# Altium PCB Main.PcbDoc
Units mm, origin at the board's own origin, x right, y up, seen from the top; angles counter-clockwise.
Board outline 95 x 57 mm, 2 copper layers (Top Layer, Bottom Layer), stack 1.671 mm thick; 77 components, 83 nets, 337 pads, 204 vias.
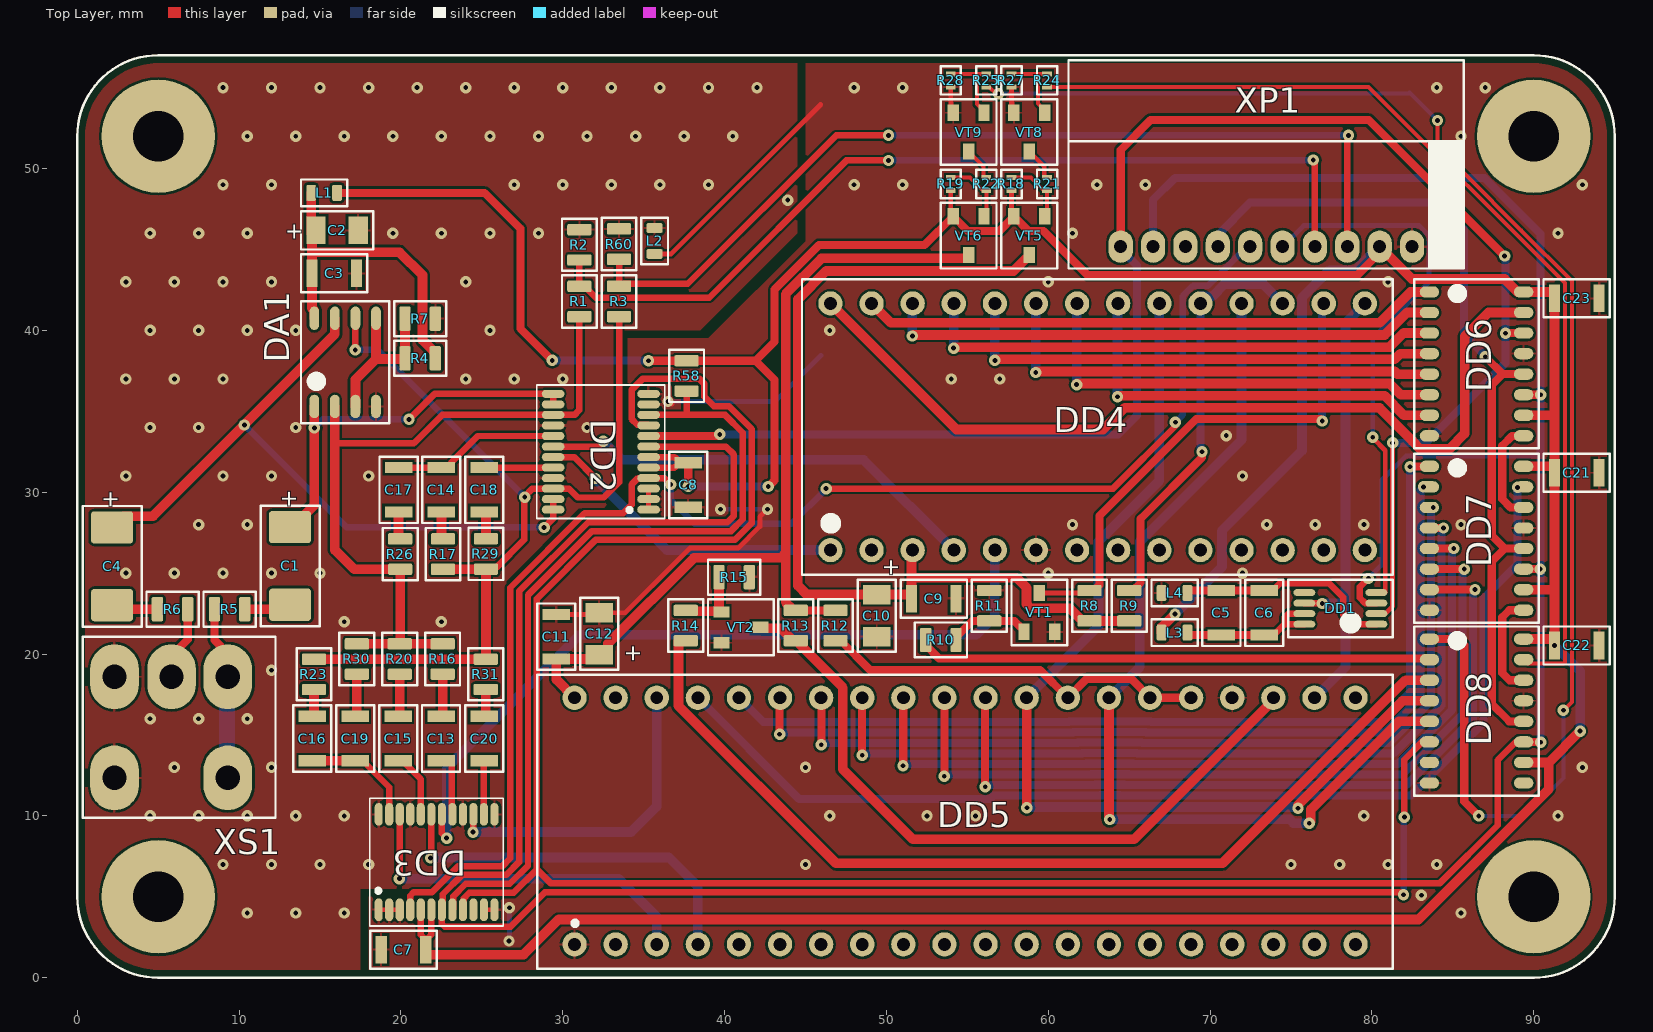
[diagram p0: Top Layer view]
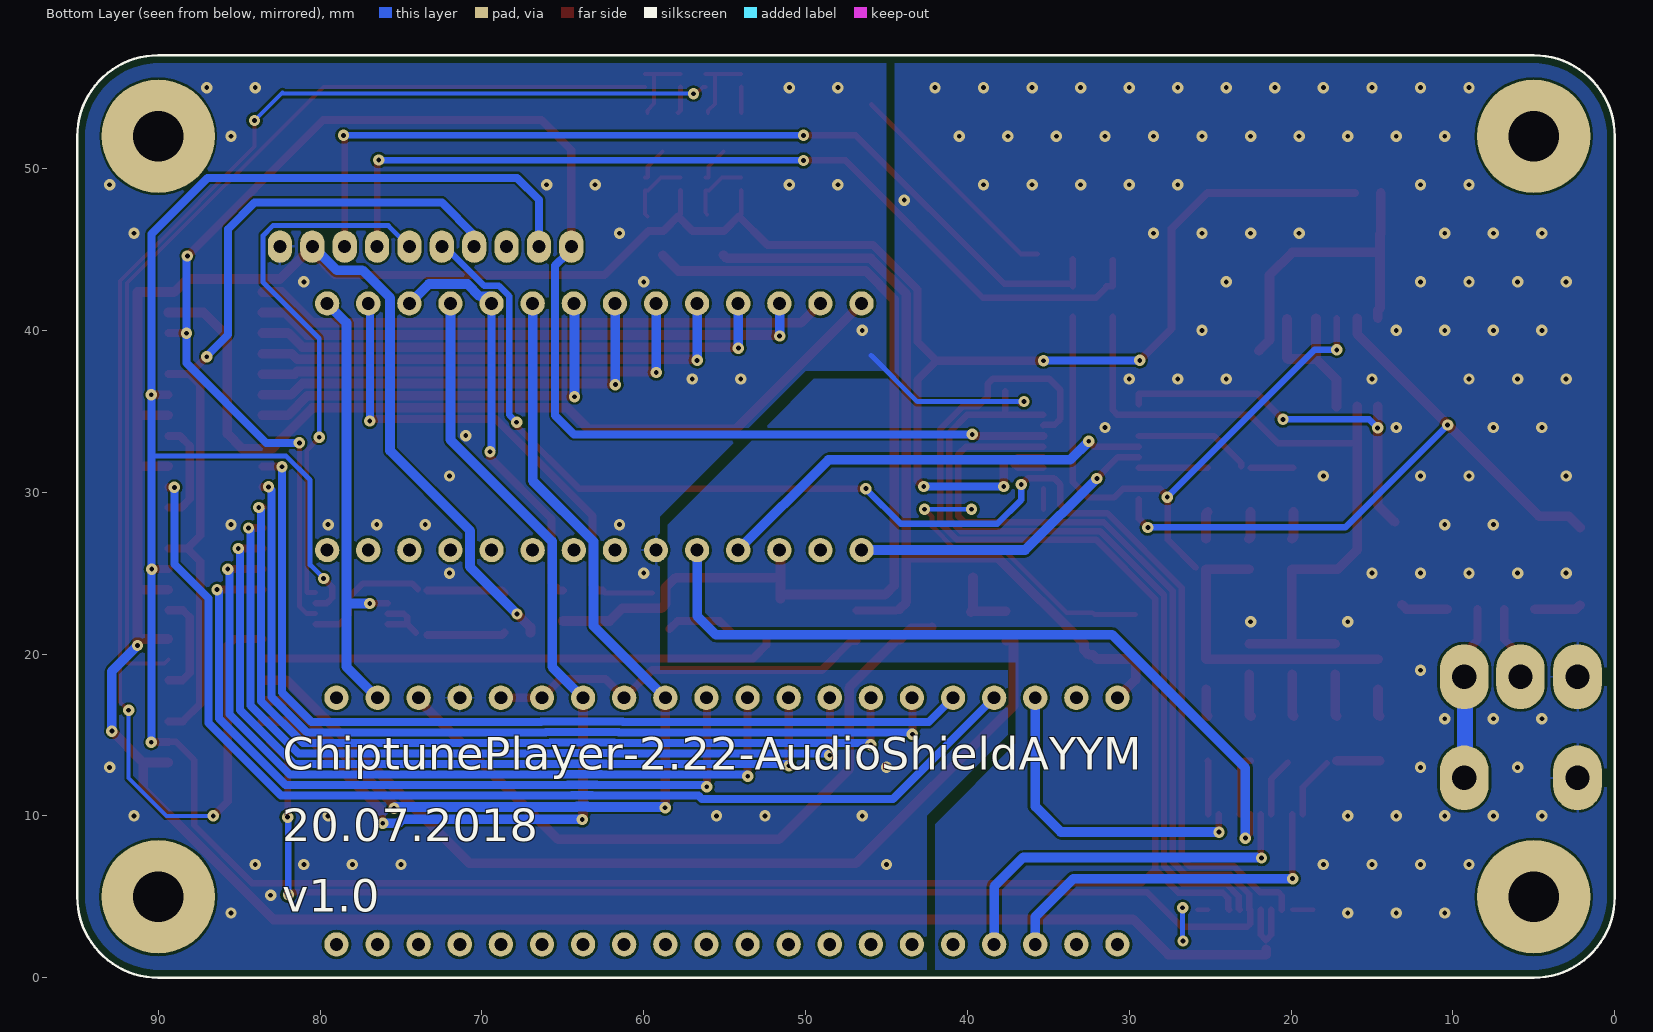
[diagram p1: Bottom Layer view, seen from below]
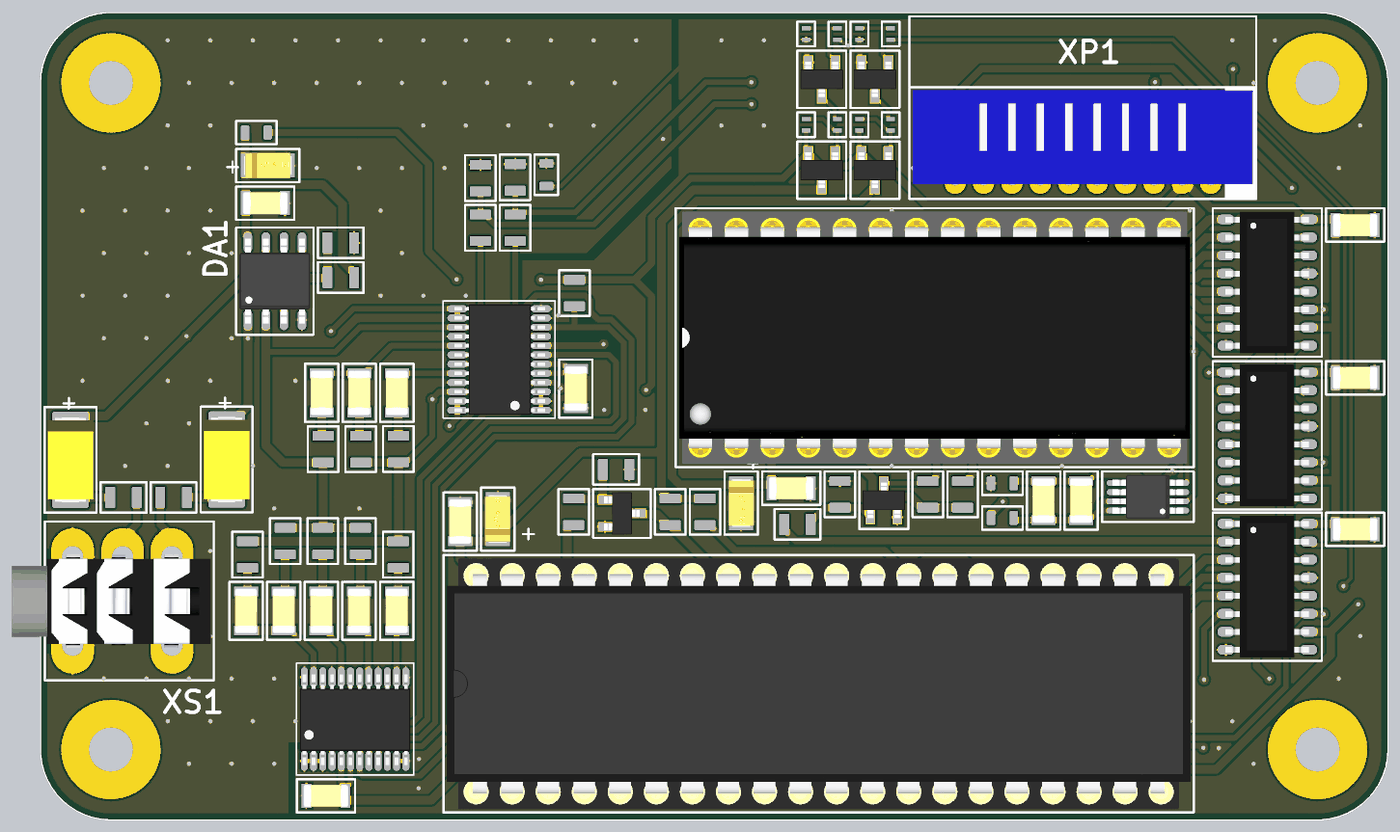
[diagram p2: 3D render of the assembled board from above, using the file's embedded part models]

## Layer stack, top to bottom
Top Solder: solder mask 0.0102, Solder Resist, Dk 3.5
Top Layer: signal copper 0.0356
Dielectric 1: dielectric 1.6, FR-4, Dk 4.8
Bottom Layer: signal copper 0.0356
Bottom Solder: solder mask 0.0102, Solder Resist, Dk 3.5

## Board outline
0,5 0,52 cw(c5,52) 5,57 90,57 cw(c90,52) 95,52 95,5 cw(c90,5) 90,0 5,0 cw(c5,5)

## Design rules (kind name [scope] priority, off if disabled: settings)
Clearance [All] p1: gap=0.15 ignorepadtopadclearanceinfootprint=FALSE
ComponentClearance [All] p1: gap=0.01 collisioncheckmode=3 verticalgap=1 showdistances=TRUE
DiffPairsRouting [All] p1: maxlimit=0.3 minlimit=0.15 mostfreqgap=0.3 toplayer_minwidth=0.15 toplayer_maxwidth=0.3 toplayer_prefwidth=0.3 bottomlayer_minwidth=0.15 bottomlayer_maxwidth=0.3 bottomlayer_prefwidth=0.3 maxuncoupledlength=12.7
HoleSize [All] p1: absolutevalues=TRUE maxlimit=3.1 minlimit=0.3 maxpercent=80.000 minpercent=20.000
HoleToHoleClearance [All] p1: gap=0.3 allowstackedmicrovias=TRUE
MatchedLengths SDIO [InNetClass('SDIO')] p1: tolerance=1 checknetsindiffpair=FALSE checkdiffpairvsdiffpair=TRUE checkxsignals=TRUE checkothers=TRUE
MatchedLengths Usb [InNetClass('Usb')] p2: tolerance=1 checknetsindiffpair=TRUE checkdiffpairvsdiffpair=FALSE checkxsignals=FALSE checkothers=FALSE
MinimumSolderMaskSliver [All] p1: minsoldermaskwidth=0.05
PlaneClearance [All] p1: clearance=0.08
PlaneConnect [All] p1: planeconnectstyle=Relief reliefexpansion=0.15 reliefentries=4 reliefconductorwidth=0.15 reliefairgap=0.15
PolygonConnect SdGND [InNet('SD_GND')] p1: thpad.connectstyle=Relief thpad.reliefconductorwidth=0.15 thpad.reliefentries=4 thpad.polygonreliefangle="90 Angle" thpad.airgapwidth=0.15 smdpad.connectstyle=Relief smdpad.reliefconductorwidth=0.15 smdpad.reliefentries=4 smdpad.polygonreliefangle="90 Angle" smdpad.airgapwidth=0.15 via.connectstyle=Direct via.reliefconductorwidth=0.254 via.reliefentries=4 via.polygonreliefangle="90 Angle" via.airgapwidth=0.254
PolygonConnect McGND [InNet('MC_GND') vs InNet('MC_GND')] p2: thpad.connectstyle=Relief thpad.reliefconductorwidth=0.15 thpad.reliefentries=4 thpad.polygonreliefangle="90 Angle" thpad.airgapwidth=0.15 smdpad.connectstyle=Relief smdpad.reliefconductorwidth=0.15 smdpad.reliefentries=4 smdpad.polygonreliefangle="90 Angle" smdpad.airgapwidth=0.15 via.connectstyle=Direct via.reliefconductorwidth=0.254 via.reliefentries=4 via.polygonreliefangle="90 Angle" via.airgapwidth=0.254
PolygonConnect BatGND [InNet('BAT_GND') vs InNet('BAT_GND')] p3: thpad.connectstyle=Relief thpad.reliefconductorwidth=0.15 thpad.reliefentries=4 thpad.polygonreliefangle="90 Angle" thpad.airgapwidth=0.15 smdpad.connectstyle=Relief smdpad.reliefconductorwidth=0.15 smdpad.reliefentries=4 smdpad.polygonreliefangle="90 Angle" smdpad.airgapwidth=0.15 via.connectstyle=Direct via.reliefconductorwidth=0.254 via.reliefentries=4 via.polygonreliefangle="90 Angle" via.airgapwidth=0.254
PolygonConnect [All] p4: thpad.connectstyle=Relief thpad.reliefconductorwidth=0.15 thpad.reliefentries=4 thpad.polygonreliefangle="90 Angle" thpad.airgapwidth=0.15 smdpad.connectstyle=Relief smdpad.reliefconductorwidth=0.15 smdpad.reliefentries=4 smdpad.polygonreliefangle="90 Angle" smdpad.airgapwidth=0.15 via.connectstyle=Direct via.reliefconductorwidth=0.15 via.reliefentries=4 via.polygonreliefangle="90 Angle" via.airgapwidth=0.15
RoutingVias [All] p1: holewidth=0.3 width=0.7 viastyle="Through Hole" minholewidth=0.3 minwidth=0.7 maxholewidth=0.3 maxwidth=0.7
SilkToSilkClearance [All] p1: silktosilkclearance=0.15
SilkToSolderMaskClearance [IsPad] p1: minsilkscreentomaskgap=0.15 clearancetoexposedcopper=FALSE
SolderMaskExpansion [All] p1: expansion=0.05
Width SUPPLAY [InNetClass('SUPPLAY')] p1: maxlimit=1 minlimit=0.3 preferedwidth=0.5
Width [All] p2: maxlimit=1 minlimit=0.15 preferedwidth=0.3
21 further rules are at their usual default settings.

## Classes and differential pairs
component class ClockGenerator: C5 C6 DD1 L3 L4
component class Connectors: XP1
component class Adc: R1 R2 R3 R60
component class AudioAmplifier: C1 C2 C3 C4 DA1 L1 L2 L? R4 R5 R6 R7 XS1
component class DigitalPotentiometers: C7 C8 DD2 DD3 R58
component class Generator28: C9 C10 DD4 R8 R9 R10 R11 VT1
component class Generator40: C11 C12 DD5 R12 R13 R14 R15 VT2
component class Mixer: C13 C14 C15 C16 C17 C18 C19 C20 C? R16 R17 R20 R23 R26 R29 R30 R31 R?
component class ShiftRegister: C21 C22 C23 DD6 DD7 DD8 DD?
component class Power5VManagement: R18 R19 R21 R22 R24 R25 R27 R28 VT5 VT6 VT8 VT9

## Components (designator, comment, footprint, x,y, rotation, side; value= is the part's Value field where it differs from the comment)
C1 "100 мкФ" "C TAN_C" 13.15,25.45 r270 top
C2 "10 мкФ" "C TAN_A" 14.45,46.975 r0 top
C3 "0.1 мкФ" "C 1206" 14.275,44.325 r0 top
C4 "100 мкФ" "C TAN_C" 2.15,25.425 r270 top
C5 "1 мкФ" "C 1206" 69.9,20.95 r90 top value="0.1 мкФ"
C6 "2.2 мкФ" "C 1206" 72.55,20.95 r90 top value="0.1 мкФ"
C7 "0.1 мкФ" "C 1206" 21.75,0.94 r180 top
C8 "0.1 мкФ" "C 1206" 38.55,32.05 r270 top
C9 "0.1 мкФ" "C 1206" 51.325,24.225 r0 top
C10 "10 мкФ" "C TAN_A" 50.2,23.975 r270 top
C11 "0.1 мкФ" "C 1206" 28.8,19.475 r90 top
C12 "10 мкФ" "C TAN_A" 31.45,19.65 r90 top
C13 "1 мкФ" "C 1206" 21.675,13.175 r90 top
C14 "1 мкФ" "C 1206" 23.3,31.75 r270 top
C15 "1 мкФ" "C 1206" 19.025,13.175 r90 top
C16 "1 мкФ" "C 1206" 13.725,13.175 r90 top
C17 "1 мкФ" "C 1206" 20.65,31.75 r270 top
C18 "1 мкФ" "C 1206" 25.95,31.75 r270 top
C19 "1 мкФ" "C 1206" 16.375,13.175 r90 top
C20 "1 мкФ" "C 1206" 24.339,13.175 r90 top
C21 "0.1 мкФ" "C 1206" 91.05,32.005 r0 top locked
C22 "0.1 мкФ" "C 1206" 91.05,21.33 r0 top locked
C23 "0.1 мкФ" "C 1206" 91.05,42.78 r0 top locked
DA1 "MCP6022" SOIC-8 16.55,38.025 r90 top
DD1 "LTC6903" MSOP_MS8 81.275,24.6 r180 top
DD2 "AD5204" TSSOP-24 32.35,32.5 r180 top locked
DD3 "AD5204" TSSOP-24 22.2,7.15 r90 top locked
DD4 "AY-3-8912" DIP28_PLUS_MCU 80.83,25.155 r90 top locked
DD5 "YM2149" DIP40_PLUS_MCU 80.255,0.79 r90 top locked
DD6 "74HC595N" SO16 86.475,37.93 r0 top locked
DD7 "74HC595N" SO16 86.475,27.155 r0 top locked
DD8 "74HC595N" SO16 86.475,16.48 r0 top locked
L1 "BLM18AG102SN1" "FB 0603" 15.25,48.5 r180 top
L2 "BLM18AG102SN1" "FB 0603" 35.675,45.525 r90 top
L3 "BLM18AG102SN1" "FB 0603" 67.8,21.325 r0 top
L4 "BLM18AG102SN1" "FB 0603" 67.8,23.775 r0 top
R1 "10 кОм" "RES 0805" 31.025,41.8 r270 top
R2 "10 кОм" "RES 0805" 31.025,45.3 r270 top
R3 "10 кОм" "RES 0805" 33.475,41.8 r270 top
R4 "10 кОм" "RES 0805" 21.175,38.275 r0 top
R5 "220 Ом" "RES 0805" 9.425,22.775 r180 top
R6 "220 Ом" "RES 0805" 5.875,22.775 r0 top
R7 "10 кОм" "RES 0805" 21.2,40.725 r180 top
R8 "1 кОм" "RES 0805" 62.55,23 r270 top
R9 "1 кОм" "RES 0805" 65,22.975 r90 top
R10 "100 Ом" "RES 0805" 53.35,20.875 r0 top
R11 "1 кОм" "RES 0805" 56.35,23 r270 top
R12 "1 кОм" "RES 0805" 46.85,21.75 r90 top
R13 "1 кОм" "RES 0805" 44.4,21.75 r90 top
R14 "100 Ом" "RES 0805" 37.6,21.75 r90 top
R15 "1 кОм" "RES 0805" 40.6,24.75 r180 top
R16 "4.7 кОм" "RES 0805" 22.575,19.683 r90 top
R17 "4.7 кОм" "RES 0805" 22.6,26.192 r270 top
R18 "4.7 кОм" "RES 0402" 57.725,49.05 r270 top
R19 "4.7 кОм" "RES 0402" 53.975,49.05 r270 top
R20 "4.7 кОм" "RES 0805" 19.925,19.683 r90 top
R21 "27 Ом" "RES 0402" 59.925,49.05 r270 top
R22 "27 Ом" "RES 0402" 56.175,49.05 r270 top
R23 "4.7 кОм" "RES 0805" 14.625,18.733 r90 top
R24 "1 кОм" "RES 0402" 59.925,55.45 r270 top
R25 "1 кОм" "RES 0402" 56.175,55.45 r270 top
R26 "4.7 кОм" "RES 0805" 19.95,26.192 r270 top
R27 "10 кОм" "RES 0402" 57.725,55.45 r90 top
R28 "10 кОм" "RES 0402" 53.975,55.45 r90 top
R29 "4.7 кОм" "RES 0805" 25.25,26.2 r270 top
R30 "4.7 кОм" "RES 0805" 17.275,19.683 r90 top
R31 "4.7 кОм" "RES 0805" 25.239,18.733 r90 top
R58 "4.7 кОм" "RES 0805" 37.65,37.175 r90 top
R60 "10 кОм" "RES 0805" 33.475,45.35 r270 top
VT1 "2N7002" SOT-23 59.45,22.575 r90 top
VT2 "2N7002" SOT-23 41,21.65 r0 top
VT5 "IRLML6402" SOT-23 58.825,45.85 r270 top
VT6 "IRLML6402" SOT-23 55.075,45.85 r270 top
VT8 "BC817" SOT-23 58.825,52.25 r270 top
VT9 "BC817" SOT-23 55.075,52.25 r270 top
XP1 "JST B10B-PH-SM4-TB" B10B-PH-SM4-TB 64.475,45.175 r0 top locked
XS1 "Jack_3.5 5-pin" "JACK 3.5 DIP" 2.3,12.35 r0 top

## Footprints (in the part's own frame and the unit in brackets; to place one, negate y for a bottom-side part, rotate by r counter-clockwise, add the part's x,y. Pads: shape width x height; smd on the part's side, far side on the other; paste and mask are expansions set on the pad)
B10B-PH-SM4-TB [mm]
  oval 1.5x2 hole 0.8: 1(18,0) 2(16,0) 3(14,0) 4(12,0) 5(10,0) 6(8,0) 7(6,0) 8(4,0) 9(2,0) 10(0,0)
  silkscreen extent -3.22,-1.35 21.2,6.55, body extent -2.97,-0.3 20.97,6.3, height 5.02
"C 1206" [mm]
  rect 0.7x1.7 smd: 1(0.225,-0.8) 2(2.975,-0.8)
  silkscreen extent -0.45,-1.97 3.65,0.38, body extent 0,-1.6 3.2,0, height 0.94
"C TAN_A" [mm]
  rect 1.2x1.7 smd: 1(0.3,-0.8) 2(2.9,-0.8)
  silkscreen extent -0.63,-1.97 3.83,0.38, body extent -0.1,-1.7 3.3,0.1, height 1.7
"C TAN_C" [mm]
  rrect20% 2x2.6 smd: 1(-2.4,0) 2(2.4,0)
  silkscreen extent -3.72,-1.83 3.72,1.83, body extent -3,-1.6 3,1.6, height 2.6
DIP28_PLUS_MCU [mm]
  round 1.5 hole 0.8: 1(1.27,34.29) 2(1.27,31.75) 3(1.27,29.21) 4(1.27,26.67) 5(1.27,24.13) 6(1.27,21.59) 7(1.27,19.05) 8(1.27,16.51) 9(1.27,13.97) 10(1.27,11.43) 11(1.27,8.89) 12(1.27,6.35) 13(1.27,3.81) 14(1.27,1.27) 15(16.51,1.27) 16(16.51,3.81) 17(16.51,6.35) 18(16.51,8.89) 19(16.51,11.43) 20(16.51,13.97) 21(16.51,16.51) 22(16.51,19.05) 23(16.51,21.59) 24(16.51,24.13) 25(16.51,26.67) 26(16.51,29.21) 27(16.51,31.75) 28(16.51,34.29)
  silkscreen extent -0.25,-0.45 18,36.05, body extent 0,-0.2 17.78,35.81, height 8.58
DIP40_PLUS_MCU [mm]
  round 1.5 hole 0.8: 1(1.27,49.53) 2(1.27,46.99) 3(1.27,44.45) 4(1.27,41.91) 5(1.27,39.37) 6(1.27,36.83) 7(1.27,34.29) 8(1.27,31.75) 9(1.27,29.21) 10(1.27,26.67) 11(1.27,24.13) 12(1.27,21.59) 13(1.27,19.05) 14(1.27,16.51) 15(1.27,13.97) 16(1.27,11.43) 17(1.27,8.89) 18(1.27,6.35) 19(1.27,3.81) 20(1.27,1.27) 21(16.51,1.27) 22(16.51,3.81) 23(16.51,6.35) 24(16.51,8.89) 25(16.51,11.43) 26(16.51,13.97) 27(16.51,16.51) 28(16.51,19.05) 29(16.51,21.59) 30(16.51,24.13) 31(16.51,26.67) 32(16.51,29.21) 33(16.51,31.75) 34(16.51,34.29) 35(16.51,36.83) 36(16.51,39.37) 37(16.51,41.91) 38(16.51,44.45) 39(16.51,46.99) 40(16.51,49.53)
  silkscreen extent -0.23,-1.02 17.93,51.82, body extent 0,-0.8 17.7,51.6, height 8.77
"FB 0603" [mm]
  rrect35% 0.6x1 smd: 1(-0.8,0) 2(0.8,0)
  silkscreen extent -1.43,-0.82 1.43,0.82, body extent -0.8,-0.43 0.8,0.43, height 0.9
"JACK 3.5 DIP" [mm]
  oval 3x4 hole 1.5: G(0,0) G(0,6.25) L(7,0) L(7,6.25) R(3.525,6.25)
  silkscreen extent -1.95,-2.47 9.95,8.72, body extent -4.27,-0.19 9.72,6.4, height 5.02
MSOP_MS8 [mm]
  oval 1.35x0.42 smd: 1(1,2.75) 2(1,2.1) 3(1,1.45) 4(1,0.8) 5(5.45,0.8) 6(5.45,1.45) 7(5.45,2.1) 8(5.45,2.75)
  silkscreen extent 0,0 6.45,3.55, body extent 0.74,0.23 5.71,3.32, height 1.1
"RES 0402" [mm]
  rect 0.3x0.6 smd: 1(-0.4,0) 2(0.4,0)
  silkscreen extent -0.87,-0.63 0.87,0.63, body extent -0.5,-0.25 0.5,0.25, height 0.35
"RES 0805" [mm]
  rrect25% 0.7x1.5 smd: 1(-0.925,0) 2(0.95,0)
  silkscreen extent -1.6,-1.07 1.63,1.07, body extent -1.05,-0.7 1.05,0.7, height 0.5
SO16 [mm]
  oval 1.2x0.7 smd: 1(-2.925,4.445) 2(-2.925,3.175) 3(-2.925,1.905) 4(-2.925,0.635) 5(-2.925,-0.635) 6(-2.925,-1.905) 7(-2.925,-3.175) 8(-2.925,-4.445) 9(2.9,-4.445) 10(2.9,-3.175) 11(2.9,-1.905) 12(2.9,-0.635) 13(2.9,0.635) 14(2.9,1.905) 15(2.9,3.175) 16(2.9,4.445)
  silkscreen extent -3.85,-5.23 3.83,5.23, body extent -2.98,-4.99 2.93,4.99, height 1.45
SOIC-8 [mm]
  oval 1.45x0.6 smd: 1(-2.725,1.905) 2(-2.725,0.635) 3(-2.725,-0.635) 4(-2.725,-1.905) 5(2.725,-1.905) 6(2.725,-0.635) 7(2.725,0.635) 8(2.725,1.905)
  silkscreen extent -3.77,-2.73 3.77,2.73, body extent -3,-2.5 3,2.5, height 1.75
SOT-23 [mm]
  rect 1x0.7 smd paste-0.05: 1(-1.2,0.95) 2(-1.2,-0.95) 3(1.2,0)
  silkscreen extent -2.02,-1.73 2.02,1.73, body extent -1.25,-1.5 1.25,1.5, height 1
TSSOP-24 [mm] "TSOP, 24-Leads, Body 7,80x4,40mm, Pitch 0,65mm, IPC Medium Density"
  oval 1.4x0.5 smd: 1(-2.95,3.575) 2(-2.95,2.925) 3(-2.95,2.275) 4(-2.95,1.625) 5(-2.95,0.975) 6(-2.95,0.325) 7(-2.95,-0.325) 8(-2.95,-0.975) 9(-2.95,-1.625) 10(-2.95,-2.275) 11(-2.95,-2.925) 12(-2.95,-3.575) 13(2.95,-3.575) 14(2.95,-2.925) 15(2.95,-2.275) 16(2.95,-1.625) 17(2.95,-0.975) 18(2.95,-0.325) 19(2.95,0.325) 20(2.95,0.975) 21(2.95,1.625) 22(2.95,2.275) 23(2.95,2.925) 24(2.95,3.575)
  silkscreen extent -3.95,-4.13 3.95,4.13, body extent -3.25,-3.9 3.15,3.9, height 1.2

## Part data
C1 C4: library part "CAP TAN_C", "SMD Tantalium Capacitor C", Size=C, Type="Конденсатор танталовый"
C2 C10 C12: library part "CAP TAN_A", "SMD Tantalium Capacitor A", Rated voltage="10 В", Size=A, Type="Конденсатор танталовый"
C3 C5 C6 C7 C8 C9 C11 C13 C14 C15 C16 C17 C18 C19 C20 C21 C22 C23: library part "CAP 1206", "SMD Capacitor 1206", Manufacturer="/Укажите компанию-производителя/", Temperature coefficient="/Формат: ±? ppm/°C/", Temperature range="/Формат: -? ... ? °C/", Tolerance="/Укажите допуск в процентах/", Size=1206, TC="/Укажите тип диэлектрика/", Type="Конденсатор керамический"
R1 R2 R3 R4 R5 R6 R7 R8 R9 R10 R11 R12 R13 R14 R15 R16 R17 R20 R23 R26 R29 R30 R31 R58 R60: library part "RES 0805"
R18 R19 R21 R22 R24 R25 R27 R28: library part "RES 0402"
VT1 VT2: "60 V, 300 mA N-channel Trench MOSFET", Drain-to-source breakdown voltage="60 В", Gate threshold voltage="2 В", Input capacitance="31 пФ", Manufacturer=NXP, Max continuous drain current="300 мА", Max gate-to-source voltage="30 В", Max pulsed drain current="1,2 А", Output capacitance="6,8 пФ", Power dissitipation="0,83 Вт", Reverse transfer capacitance="3,5 пФ", Temperature range="-65 ... 150 °C", Rds="2,8 Ом", Structure="Индуцированный канал n-типа", Turn-off time="11 нс", Turn-on time="2,5 нс", Type="Транзистор полевой с изолированным затвором"
VT8 VT9: "NPN general-purpose transistor", Base-emitter on voltage="1,2 В", Collector-emitter saturation voltage="0,7 В", Manufacturer=NXP, Max collector-base voltage="50 В", Max collector-emitter voltage="45 В", Max collector current="0,5 А", Max collector peak current="1 А", Max emitter-base voltage="5 В", Power dissitipation="0,25 Вт", Temperature range="-65 ... 150 °C", Collector-base сapacitance="3 пФ", Complement=BC807, fT="100 МГц", hFE="160 ... 600", Specitication="ЭКБ ИП", Structure=n-p-n, Type="Транзистор биполярный"
XP1: "PLS connector", Manufacturer=NONAME, Connector type="Вилка на плату", Number of contacts=10, Type="Разъем штыревой"

## Free pads (board coordinates)
  round 7 hole 3.1: 0(5,5) 0(5,52) 0(90,5) 0(90,52)

## Via types
v1: diameter 0.7, hole 0.3, Top Layer to Bottom Layer, tented both sides, 204 vias

## Nets (pads, with @x,y where several pads share a name; then routed paths per layer and width w, separated by ;. In a path a pad name is that pad's centre, name@x,y a point inside that pad or via, vN(x,y) a via of type N, cw(c..) or ccw(c..) an arc to the next point about the centre after c; other vN are vias at no path point)
AC1_A: DD3.19 DD5.4 | length 23.3
  Top Layer w0.4: v1(21.825,7.4) 21.875,7.45 DD3.19
  Bottom Layer w0.6: v1@22.125,7.425 36.55,7.425 38.345,5.63 DD5.4
AC1_A_RES: C15.1 DD3.20 | length 3.6
  Top Layer w0.4: C15.1@20.2,13.3 21.225,12.275 DD3.20
AC1_B: DD3.22 DD5.3 | length 22.6
  Top Layer w0.4: v1(19.9,6.125) 19.925,6.15 DD3.22
  Bottom Layer w0.6: v1(19.9,6.125) 33.45,6.125 35.805,3.77 DD5.3
AC1_B_RES: C16.1 C19.1 DD3.23 | length 6.4
  Top Layer w0.4: C19.1@17.8,13.25 19.275,11.775 DD3.23
  Top Layer w0.6: C16.1 C19.1
AC1_C: DD3.15 DD5.38 | length 19.8
  Top Layer w0.4: v1(24.45,9) 24.475,9.025 DD3.15
  Bottom Layer w0.6: v1(24.45,9) 34.225,9 35.805,10.58 DD5.38
AC1_C_RES: C20.1 DD3.14 | length 3.3
  Top Layer w0.4: DD3.14 25.125,13.386 C20.1
AC_A: DD3.18 DD4.5 | length 47.8
  Top Layer w0.4: DD3.18 22.525,8.925 v1(22.825,8.625)
  Bottom Layer w0.6: v1(22.825,8.625) 22.825,12.975 31.05,21.2 55.55,21.2 56.7,22.35 DD4.5
AC_A_RES: C13.1 DD3.17 | length 3.8
  Top Layer w0.4: C13.1 22.85,13.4 23.125,13.125 23.125,10.15 DD3.17
AC_B: DD2.18 DD4.4 | length 27.7
  Top Layer w0.4: DD2.18 32.175,32.825 v1(32.5,33.15)
  Bottom Layer w0.6: v1(32.5,33.15) 33.65,32 48.585,32 DD4.4
AC_B_RES: C14.1 C17.1 DD2.17 | length 9.9
  Top Layer w0.4: C17.1 C14.1 ; C14.1@23.075,31.6 23.075,31.8 24.75,33.475 DD2.17
AC_C: DD2.19 DD4.1 | length 19.6
  Top Layer w0.4: DD2.19 30.7,32.175 32.025,30.85 v1(32,30.85)
  Bottom Layer w0.6: v1(32,30.85) 36.425,26.425 DD4.1
AC_C_RES: C18.1 DD2.20 | length 4.2
  Top Layer w0.4: C18.1 DD2.20
AD5204_CS: DD2.4 DD3.4 XP1.6 | length 87.3
  Top Layer w0.4: DD3.4 20.575,5.075 20.775,5.275 21.918,5.275 23.543,6.9 26.272,6.9 26.75,7.378 26.75,24.106 31.344,28.7 33.725,28.7 34.25,29.225 34.25,30.474 34.651,30.875 DD2.4 36.275,30.875 v1(36.675,30.475) ; v1(46.275,30.225) 64.001,30.225 67.851,34.074 v1(67.851,34.326)
  Bottom Layer w0.4: v1(36.675,30.475) 36.675,29.525 38.15,28.05 44.125,28.05 46.275,30.2 v1(46.275,30.225) ; v1(67.851,34.326) 68.3,34.775 68.3,42.121 68.944,42.765 69.856,42.765 69.863,42.758 72.281,45.175 XP1.6
ADC_LEFT: R1.1 R2.2 XP1.4 | length 56.1
  Top Layer w0.4: R2.2 R1.1 R1.1@31.425,42.725 ; R1.1@31.45,42.625 32.05,42.025 39.05,42.025 47.525,50.5 v1(50.125,50.5) ; v1(76.375,50.525) 76.475,50.425 XP1.4
  Bottom Layer w0.4: v1(50.125,50.5) 76.35,50.5 v1(76.375,50.525)
ADC_RIGHT: R3.1 R60.2 XP1.3 | length 57.5
  Top Layer w0.4: R3.1 R3.1@33.475,42.875 ; R60.2 R3.1@33.475,42.875 ; v1(50.125,52.05) 46.9,52.05 37.725,42.875 R3.1@33.475,42.875 ; XP1.3 78.475,51.975 v1(78.55,52.05)
  Bottom Layer w0.4: v1(50.125,52.05) v1(78.55,52.05)
AUDIO_GND: C2.2 C3.2 DA1.4 DD2.16 DD2.21 DD3.13 DD3.16 DD3.21 DD3.24 L2.2 R2.1 R7.1 R60.1 XS1.G
  other v1: 10.5,4 13.5,4 16.5,4 9,7 12,7 15,7 18,7 4.5,10 7.5,10 10.5,10 13.5,10 16.5,10 6,13 12,13 4.5,16 7.5,16 10.5,16 12,19 16.5,22 22.5,22 3,25 6,25 9,25 12,25 15,25 7.5,28 10.5,28 3,31 9,31 12,31 18,31 4.5,34 7.5,34 13.5,34 31.5,34 3,37 6,37 9,37 15,37 24,37 27,37 30,37 4.5,40 7.5,40 10.5,40 13.5,40 25.5,40 3,43 6,43 9,43 12,43 24,43 4.5,46 7.5,46 10.5,46 19.5,46 22.5,46 25.5,46 28.5,46 43.9,48.05 9,49 12,49 27,49 30,49 33,49 36,49 39,49 10.5,52 13.5,52 16.5,52 19.5,52 22.5,52 25.5,52 28.5,52 31.5,52 34.5,52 37.5,52 40.5,52 9,55 12,55 15,55 18,55 21,55 24,55 27,55 30,55 33,55 36,55 39,55 42,55
AUDIO_VDD: C2.1 C3.1 DA1.8 L1.2 R4.2 | length 20.2
  Top Layer w0.6: L1.2 14.45,45.975 14.5,45.925 14.5,44.825 ; DA1.8 14.645,41.23 14.5,41.375 C3.1 14.5,44.825 ; R4.2@21.975,38.75 21.325,39.4 21.325,43.425 19.925,44.825 14.5,44.825
AY1_VDD: C9.1 C10.1 DD4.3 R8.2 R9.1 VT5.3 | length 58.5
  Top Layer w0.6: C10.1 45.075,23.675 44.525,24.225 44.525,41.924 46.276,43.675 57.85,43.675 VT5.3 ; C10.1@49.475,23.675 C9.1@51.55,23.675 ; C9.1 C9.1@51.55,23.675 ; DD4.3 51.55,26.355 51.55,24.775 ; R9.1 R8.2 62.107,22.05 61.332,22.825 58.914,22.825 58.65,23.089 58.65,24.1 58.025,24.725 51.6,24.725 51.55,24.775 ; C9.1@51.55,23.675 51.55,24.775
AY2_VDD: C11.1 C12.1 DD5.40 R12.2 R13.2 VT6.3 | length 54.4
  Top Layer w0.5: R13.2 R12.2
  Top Layer w0.6: DD5.40 29.6,18.425 C11.1 32,19.7 C12.1 32.5,19.95 32.8,20.25 32.8,20.65 38.1,25.95 43.475,25.95 43.775,26.25 ; R13.2@44.2,22.775 43.775,23.2 43.775,26.25 ; VT6.3 54.875,44.45 45.99,44.45 43.775,42.235 43.775,26.25
AY_1_RES: DD8.2 R10.1 | length 31.8
  Top Layer w0.5: R10.1 52.425,20.55 53.25,19.725 83.48,19.725 DD8.2
AY_2_RES: DD8.3 R14.1 | length 59.6
  Top Layer w0.6: R14.1 37.145,20.825 37.145,16.803 46.873,7.075 70.775,7.075 82.085,18.385 DD8.3
AY_CLK: DD1.6 DD4.15 DD5.22 | length 28.2
  Top Layer w0.4: DD1.6 76.9,23.15 v1(76.925,23.125)
  Bottom Layer w0.6: DD5.22 78.36,19.215 78.36,23.175 ; v1(76.925,23.125) 78.31,23.125 78.36,23.175 ; DD4.15 78.36,40.465 78.36,23.175
BAT_GND: C7.2 C8.2 C9.2 C10.2 C11.2 C12.2 C21.2 C22.2 C23.2 DD2.1 DD2.2 DD2.3 DD2.11 DD2.12 DD3.1 DD3.2 DD3.3 DD3.11 DD3.12 DD4.6 DD5.1 DD5.24 DD6.8 DD6.13 DD7.8 DD7.13 DD8.8 DD8.13 L2.1 L4.1 R11.1 R15.1 R27.1 R28.1 VT1.2 VT2.2 VT8.2 VT9.2 XP1.1 | length 52.8
  Top Layer w0.3: DD3.1 DD3.2 DD3.3 ; DD3.11 DD3.12 ; v1@26.5,4.325 v1(26.7,4.325) ; C11.2 32.15,22.45 C12.2 33.851,22.55 37.851,26.55 40.835,26.55 42.175,27.89 42.175,28.475 v1(42.65,28.95) ; DD2.1 DD2.2 DD2.3 ; L2.1 36.7,44.725 45.925,53.95 ; v1(36.502,35.602) 36.598,35.602 v1@36.75,35.45 ; VT9.2@53.975,53.45 R28.1 ; R27.1 57.725,53.6 VT8.2
  Bottom Layer w0.3: v1(26.675,2.275) 26.7,2.3 v1(26.7,4.325) ; v1(36.502,35.602) 43.102,35.602 45.95,38.45 ; v1(39.75,28.95) v1(42.65,28.95)
  other v1: 85.5,4 83.05,5.1 45,7 75,7 78,7 81,7 84,7 46.5,10 52.5,10 55.5,10 79.5,10 91.5,10 45,13 93,13 60,25 72,25 61.5,28 73.5,28 76.5,28 79.5,28 85.5,28 72,31 71,33.5 54,37 57,37 46.5,40 60,43 81,43 61.5,46 91.5,46 48,49 51,49 63,49 66,49 93,49 85.5,52 48,55 51,55 84,55 87,55
BC1: DD4.20 DD5.29 DD8.4 | length 62.5
  Top Layer w0.6: DD5.29 58.675,17.29 v1(58.675,10.5) ; v1(75.425,10.475) 75.425,10.664 81.876,17.115 DD8.4
  Bottom Layer w0.6: DD5.29 63.1,21.735 63.1,26.95 66.86,30.71 DD4.20 ; v1(58.675,10.5) 58.625,10.55 63.444,10.55 63.469,10.575 64.131,10.575 64.156,10.55 75.35,10.55 v1(75.425,10.475)
BDIR: DD4.18 DD5.27 DD8.5 | length 58.2
  Top Layer w0.6: DD5.27 63.745,9.83 v1(63.8,9.775) ; v1(76.125,9.55) 76.225,9.65 76.225,10.404 81.666,15.845 DD8.5
  Bottom Layer w0.6: DD5.27 65.66,19.215 65.66,26.96 71.94,33.24 DD4.18 ; v1(63.8,9.775) 63.835,9.81 63.846,9.8 74.9,9.8 75.15,9.55 v1(76.125,9.55)
BOARD_CLK: DD1.3 DD2.9 DD3.9 DD6.11 DD7.11 DD8.11 XP1.9 | length 206.4
  Top Layer w0.4: DD3.9 23.875,4.25 23.875,4.899 24.226,5.25 26.956,5.25 28.4,6.694 ; DD2.9 35.25,34.175 34.601,34.175 34.25,34.526 34.25,36.324 34.951,37.025 38.419,37.025 38.75,36.694 38.75,35.9 39.325,35.325 40.253,35.325 41.675,33.903 41.675,28.097 40.628,27.05 32.028,27.05 28.4,23.422 28.4,6.694 ; v1(79.775,24.675) 79.25,24.15 79.25,23.475 79.575,23.15 DD1.3 ; DD8.11 88.9,14.575 87.775,13.45 87.775,9.425 84.175,5.825 29.269,5.825 28.4,6.694
  Top Layer w0.5: DD8.11 90.4,14.575 v1(90.425,14.55) ; DD7.11 v1(90.4,25.25) ; DD6.11 v1(90.425,36.025)
  Bottom Layer w0.3: v1(79.775,24.675) 80.61,25.51 80.61,30.754 82.106,32.25 90.4,32.25 90.425,32.275
  Bottom Layer w0.5: XP1.9 66.475,48.075 67.825,49.425 86.95,49.425 90.425,45.95 v1(90.425,36.025) 90.425,32.275 v1(90.425,14.55)
BOARD_TX: DD1.2 DD2.8 DD6.14 XP1.10 | length 103
  Top Layer w0.3: DD1.2 80.811,22.5 81.275,22.964 v1(81.275,33.05)
  Top Layer w0.5: DD2.8 39.7,33.475 v1(39.7,33.575) ; XP1.10 64.475,51.15 66.325,53 79.8,53 v1(88.2,44.6) ; v1(88.25,39.825) 88.26,39.835 DD6.14
  Bottom Layer w0.5: v1(39.7,33.575) 64.3,33.575 65.47,34.745 65.47,44.005 XP1.10@64.775,44.7 ; v1(81.275,33.05) 83.325,33.05 88.25,37.975 v1(88.25,39.825) 88.25,44.55 v1(88.2,44.6)
DA0: DD4.28 DD6.15 | length 54.7
  Top Layer w0.6: DD4.28 54.33,33.875 63.383,33.875 64.723,35.215 80.46,35.215 82.5,33.175 82.5,33.154 82.969,32.685 84.785,32.685 85.725,33.625 85.725,39.625 87.205,41.105 DD6.15
DA1: DD4.27 DD6.1 | length 35.8
  Top Layer w0.6: DD4.27 50.28,40.465 80.471,40.465 82.381,42.375 DD6.1
DA2: DD4.26 DD6.2 | length 34.6
  Top Layer w0.6: v1(51.6,39.65) 51.665,39.715 80.781,39.715 82.171,41.105 DD6.2
  Bottom Layer w0.6: v1(51.6,39.65) 51.6,41.635 51.625,41.66 DD4.26
DA3: DD4.25 DD6.3 | length 32.6
  Top Layer w0.6: v1(54.153,38.902) 54.216,38.965 81.092,38.965 81.962,39.835 DD6.3
  Bottom Layer w0.6: v1(54.153,38.902) 54.153,41.658 DD4.25
DA4: DD4.24 DD6.4 | length 30.5
  Top Layer w0.6: v1(56.7,38.15) 56.765,38.215 81.403,38.215 81.753,38.565 DD6.4
  Bottom Layer w0.6: v1(56.7,38.15) DD4.24
DA5: DD4.23 DD6.5 | length 28.8
  Top Layer w0.6: v1@59.205,37.4 v1(59.225,37.4) 59.2,37.425 59.24,37.465 81.41,37.465 81.58,37.295 DD6.5
  Bottom Layer w0.6: v1(59.225,37.4) 59.225,41.65 DD4.23
DA6: DD4.22 DD6.6 | length 27.2
  Top Layer w0.6: v1(61.753,36.652) 61.753,36.712 61.75,36.715 81.081,36.715 81.771,36.025 DD6.6
  Bottom Layer w0.6: v1(61.753,36.652) 61.753,41.638 DD4.22
DA7: DD4.21 DD6.7 | length 25.6
  Top Layer w0.6: v1@64.273,35.902 v1(64.278,35.902) 64.278,35.962 64.275,35.965 80.771,35.965 81.981,34.755 DD6.7
  Bottom Layer w0.6: v1(64.278,35.902) 64.278,41.623 DD4.21
LEFT_IN: DA1.2 DD2.15 R1.2 R16.2 R20.2 R26.2 R30.2 | length 45
  Top Layer w0.4: 15.915,33.025 20.8,33.025 22.55,34.775 DD2.15 30.725,34.775 31.025,35.075 R1.2
  Top Layer w0.6: DA1.2 15.915,33.025 15.915,26.435 17.108,25.242 R26.2 19.95,20.659 R20.2 ; R30.2 R20.2 ; R16.2 R20.2
LEFT_OUT: C1.1 DA1.1 DD2.13 DD2.14 | length 23.8
  Top Layer w0.4: v1(20.5,34.5) 22.075,36.075 DD2.13 DD2.14
  Top Layer w0.6: C1.1@13.6,28.175 14.645,29.22 DA1.1
  Bottom Layer w0.4: v1(14.65,33.975) 15.175,34.5 v1(20.5,34.5)
LTC_CS: DD1.4 XP1.5 | length 34.2
  Top Layer w0.3: v1(80.05,33.4) 80.05,33.356 80.825,32.581 80.825,23.8 DD1.4
  Bottom Layer w0.3: XP1.5 75.775,46.475 82.91,46.475 83.525,45.86 83.525,42.975 80.05,39.5 v1(80.05,33.4)
NetC1_2: C1.2 R5.1 | length 2.9
  Top Layer w0.6: R5.1 12.875,22.775 C1.2
NetC4_2: C4.2 R6.1 | length 2.9
  Top Layer w0.6: C4.2 2.4,22.775 R6.1
NetC5_1: C5.1 C6.1 DD1.7 DD1.8 L3.2 | length 8.5
  Top Layer w0.4: C6.1@74.075,21.325 74.6,21.85 ; DD1.8 74.6,21.85 ; DD1.7 74.825,22.5 74.6,22.275 74.6,21.85
  Top Layer w0.5: L3.2 68.75,21.175 C5.1 C6.1
NetC5_2: C5.2 C6.2 DD1.1 L4.2 | length 13
  Top Layer w0.4: C6.2@73.95,24 74.31,24.36 77.365,24.36 78.225,23.5 78.225,22.425 78.8,21.85 DD1.1
  Top Layer w0.5: L4.2 68.75,23.925 C5.2 C6.2
NetC13_2: C13.2 R16.1 | length 2.6
  Top Layer w0.6: C13.2 22.575,16.25 R16.1
NetC14_2: C14.2 R17.1 | length 1.7
  Top Layer w0.6: C14.2 22.5,27.217 R17.1
NetC15_2: C15.2 R20.1 | length 2.6
  Top Layer w0.6: C15.2 19.925,16.25 R20.1
NetC16_2: C16.2 R23.1 | length 1.7
  Top Layer w0.6: C16.2 14.625,16.25 R23.1
NetC17_2: C17.2 R26.1 | length 1.7
  Top Layer w0.6: C17.2 19.85,27.217 R26.1
NetC18_2: C18.2 R29.1 | length 1.7
  Top Layer w0.6: C18.2 25.25,28.675 R29.1
NetC19_2: C19.2 R30.1 | length 2.6
  Top Layer w0.6: C19.2 17.275,16.25 R30.1
NetC20_2: C20.2 R31.1 | length 1.7
  Top Layer w0.6: C20.2 25.239,16.25 R31.1
NetDA1_3: DA1.3 DA1.5 R4.1 R7.2 | length 10.2
  Top Layer w0.6: DA1.3 17.185,36.96 18.455,38.23 ; DA1.5 18.455,38.23 ; R7.2 R4.1 20.205,38.23 18.455,38.23
NetDD4_16: DD4.16 R8.1 VT1.3 | length 31.8
  Top Layer w0.3: VT1.3 62.4,23.775 R8.1
  Top Layer w0.5: R8.1 62.825,23.925 63.17,24.27 63.17,28.545 69.14,34.515 76.81,34.515 v1(76.925,34.4)
  Bottom Layer w0.5: v1(76.925,34.4) 76.925,41.57 DD4.16
NetDD4_17: DD4.17 DD4.19 R9.2 | length 26.1
  Top Layer w0.5: R9.2 65.225,23.925 65.71,24.41 65.71,28.36 69.5,32.15 v1(69.5,32.5)
  Bottom Layer w0.5: DD4.19 69.4,32.6 v1(69.5,32.5)
  Bottom Layer w0.6: DD4.19 69.4,42.115 69.586,42.115 69.594,42.108 70.132,42.108 70.89,42.865 73.28,42.865 DD4.17
NetDD5_23: DD5.23 R13.1 VT2.3 | length 43.5
  Top Layer w0.6: VT2.3 42.25,21.6 43.45,21.6 R13.1@44.15,20.9 ; R13.1 47.3,17.925 47.3,12.875 51.625,8.55 65.3,8.55 73.905,17.155 DD5.23
NetDD5_25: DD5.25 DD5.26 DD5.28 R12.1 | length 24.4
  Top Layer w0.5: R12.1 47.175,20.825 48.975,19.025 59.48,19.025 DD5.28 62.355,18.45 65.135,18.45 DD5.26 DD5.25
NetR5_2: R5.2 XS1.L | length 9
  Top Layer w0.5: R5.2 8.475,20.875 8.875,20.475 XS1.L@8.875,20.2
  Bottom Layer w1: XS1.L@9.25,12.883 XS1.L@9.25,19.134
NetR6_2: R6.2 XS1.R | length 3
  Top Layer w0.5: XS1.R@6.05,20.125 6.825,20.9 R6.2
NetR10_2: R10.2 R11.2 VT1.1 | length 4.5
  Top Layer w0.5: R10.2@54.475,21.225 55.3,22.05 R11.2 57.9,22.05 VT1.1@58.4,21.55
NetR14_2: R14.2 R15.2 VT2.1 | length 4.3
  Top Layer w0.6: R14.2@37.625,22.65 VT2.1@39.7,22.65 ; R15.2 39.65,22.725 39.675,22.7 39.7,22.7 VT2.1
NetR18_1: R18.1 R21.2 VT5.1 | length 4.2
  Top Layer w0.25: R18.1 58.925,49.45 59.725,48.65 R21.2 59.925,47.2 VT5.1
NetR19_1: R19.1 R22.2 VT6.1 | length 4
  Top Layer w0.25: R19.1 55.175,49.45 55.975,48.65 R22.2 56.175,47.275 VT6.1@56.075,47.175
NetR21_1: R21.1 VT8.3 | length 2.1
  Top Layer w0.25: VT8.3 59.75,50.125 59.75,49.475 59.775,49.45 R21.1
NetR22_1: R22.1 VT9.3 | length 2.2
  Top Layer w0.25: VT9.3 56,50.125 56,49.45 R22.1
NetR24_1: R24.1 R27.2 VT8.1 | length 4.8
  Top Layer w0.25: R27.2 59.25,55.85 ; VT8.1 59.775,53.6 59.35,54.025 59.35,55.75 59.25,55.85 ; R24.1 59.25,55.85
NetR25_1: R25.1 R28.2 VT9.1 | length 4.8
  Top Layer w0.25: R28.2 55.575,55.85 ; VT9.1 56.025,53.575 55.6,54 55.6,55.85 R25.1
PB0: DD5.37 DD7.15 | length 68.9
  Top Layer w0.5: v1(89,30.3) 89.345,30.3 DD7.15
  Bottom Layer w0.5: DD5.37 44.595,11.05 56.411,11.05 56.611,11.25 63.154,11.25 63.179,11.275 64.421,11.275 64.446,11.25 82.41,11.25 86.9,15.74 86.9,23.449 89,25.549 v1(89,30.3)
PB1: DD5.36 DD7.1 | length 58
  Top Layer w0.5: v1(82.35,31.575) 82.375,31.6 DD7.1
  Bottom Layer w0.5: DD5.36 42.385,15.8 61.269,15.8 61.294,15.825 66.306,15.825 66.331,15.8 80.525,15.8 82.35,17.625 v1(82.35,31.575)
PB2: DD5.35 DD7.2 | length 56.3
  Top Layer w0.5: v1(43.4,15.05) 43.4,17.275 DD5.35 ; v1(83.18,30.33) DD7.2
  Bottom Layer w0.5: v1(43.4,15.05) 43.4,15.15 61.538,15.15 61.563,15.175 66.037,15.175 66.062,15.15 80.794,15.15 83,17.356 83,30.15 v1(83.18,30.33)
PB3: DD5.34 DD7.3 | length 54
  Top Layer w0.5: DD5.34 45.975,17.29 v1(45.975,14.4) ; DD7.3 v1(83.79,29.06)
  Bottom Layer w0.5: v1(45.975,14.4) 45.975,14.45 46.025,14.5 61.807,14.5 61.832,14.525 65.768,14.525 65.792,14.5 81.063,14.5 83.65,17.087 83.65,28.92 v1(83.79,29.06)
PB4: DD5.33 DD7.4 | length 52.6
  Top Layer w0.5: v1(48.5,13.75) 48.5,17.295 DD5.33 ; DD7.4 v1(84.415,27.79)
  Bottom Layer w0.5: v1(48.5,13.75) 48.5,13.85 62.077,13.85 62.102,13.875 65.498,13.875 65.523,13.85 81.333,13.85 84.3,16.817 84.3,27.675 v1(84.415,27.79)
PB5: DD5.32 DD7.5 | length 55.4
  Top Layer w0.5: DD7.5 83.555,26.525 v1(85.05,26.525) ; v1@51.025,13.065 51.045,13.045 DD5.32 51.025,17.28 v1(51.025,13.1) v1@51.025,13.065
  Bottom Layer w0.5: v1(51.025,13.1) 51.025,13.125 51.1,13.2 62.346,13.2 62.371,13.225 65.229,13.225 65.254,13.2 81.602,13.2 84.95,16.548 84.95,26.425 v1(85.05,26.525)
PB6: DD5.31 DD7.6 | length 49.7
  Top Layer w0.5: v1(53.575,12.45) 53.585,12.46 DD5.31 ; DD7.6 v1(85.7,25.25)
  Bottom Layer w0.5: v1(53.575,12.45) 53.575,12.5 53.625,12.55 62.615,12.55 62.64,12.575 64.96,12.575 64.985,12.55 81.871,12.55 85.6,16.279 85.6,25.15 v1(85.7,25.25)
PB7: DD5.30 DD7.7 | length 48.3
  Top Layer w0.5: v1(56.1,11.8) 56.1,17.275 DD5.30 ; DD7.7 v1(86.37,23.98)
  Bottom Layer w0.5: v1(56.1,11.8) 56.1,11.9 62.884,11.9 62.909,11.925 64.691,11.925 64.716,11.9 82.14,11.9 86.25,16.01 86.25,23.86 v1(86.37,23.98)
PWR_AY1_ON: DD8.15 R24.2 | length 63.1
  Top Layer w0.25: R24.2 79.794,55.05 91.925,42.919 91.925,19.48 91.85,19.405 89.625,19.405 DD8.15
PWR_AY2_ON: DD8.1 R25.2 | length 92.5
  Top Layer w0.25: R25.2 56.35,55.05 56.775,54.625 v1(56.925,54.625) ; v1(84.05,52.975) 84.05,51.36 85.743,49.667 89.192,46.217 92.35,43.06 92.35,17.05 v1(91.825,16.525)
  Top Layer w0.5: DD8.1 85.325,20.925 85.7,20.55 85.7,10.9 v1(86.6,10)
  Bottom Layer w0.25: v1(56.925,54.625) 82.25,54.625 82.325,54.7 v1(84.05,52.975) ; v1(86.6,10) 89.475,10 91.825,12.35 v1(91.825,16.525)
QY_1: DD6.9 DD7.14 | length 6.4
  Top Layer w0.5: DD7.14 88.565,29.06 88.05,29.575 88.05,32.875 88.66,33.485 DD6.9
QY_2: DD7.9 DD8.14 | length 6.5
  Top Layer w0.5: DD8.14 88.49,18.385 88.05,18.825 88.05,22.275 88.485,22.71 DD7.9
RES_2_IN: DD2.10 DD3.8 R58.1 | length 51.2
  Top Layer w0.4: DD3.8 23.225,4.25 23.225,5.026 23.999,5.8 26.728,5.8 27.85,6.922 27.85,23.65 31.8,27.6 40.4,27.6 41.125,28.325 41.125,33.675 40.025,34.775 DD2.10 ; R58.1 37.65,34.9 37.675,34.875
RIGHT_IN: DA1.6 DD2.22 R3.2 R17.2 R23.2 R29.2 R31.2 | length 57
  Top Layer w0.4: v1(17.175,38.8) 17.185,38.81 DA1.6 ; R29.2@25.9,25.35 27.625,27.075 v1@27.625,29.7 ; v1@27.625,29.725 28.125,30.225 DD2.22 30.375,30.225 30.925,29.675 32.525,29.675 33.475,30.625 R3.2
  Top Layer w0.6: R23.2 R31.2 25.25,19.695 R29.2 25.242,25.242 R17.2
  Bottom Layer w0.4: v1(17.175,38.8) 18.55,38.8 v1(27.65,29.7)
RIGHT_OUT: C4.1 DA1.7 DD2.23 DD2.24 | length 42.8
  Top Layer w0.4: v1(28.85,27.825) 29.4,28.375 DD2.24 DD2.23
  Top Layer w0.6: C4.1 2.85,28.525 4.675,28.525 15.915,39.765 DA1.7
  Bottom Layer w0.4: v1(10.325,34.15) 16.65,27.825 v1(28.85,27.825)
SH_STROB: DD6.12 DD7.12 DD8.12 XP1.7 | length 53.6
  Top Layer w0.5: v1(87,38.375) 88.08,37.295 ; DD8.12 88.48,15.845 87.4,16.925 87.4,25.715 88.205,26.52 ; DD7.12 88.205,26.52 ; DD6.12 88.08,37.295 ; 88.08,37.295 87.4,36.615 87.4,27.325 88.205,26.52
  Bottom Layer w0.5: XP1.7 70.475,45.9 72.475,47.9 84.05,47.9 85.675,46.275 85.675,39.75 87,38.425 v1(87,38.375)
SHDN: DD2.7 DD3.7 DD8.6 | length 119.1
  Top Layer w0.4: DD2.7 40.075,32.825 40.575,32.325 40.575,28.553 40.172,28.15 31.572,28.15 27.3,23.878 27.3,7.15 26.5,6.35 23.771,6.35 22.575,5.154 22.575,4.2 DD3.7 22.525,3.325 22.7,3.15 26.775,3.15 28.9,5.275 81.8,5.275 v1(81.95,5.125) ; v1(82,9.925) 82,13.475 DD8.6@83.15,14.625
  Bottom Layer w0.4: v1(81.95,5.125) 81.95,9.875 v1(82,9.925)
VDD_5V: C7.1 C8.1 C21.1 C22.1 C23.1 DD2.5 DD2.6 DD3.5 DD3.6 DD6.10 DD6.16 DD7.10 DD7.16 DD8.10 DD8.16 L1.1 L3.1 R18.2 R19.2 R58.2 VT5.2 VT6.2 XP1.2 | length 264.4
  Top Layer w0.3: R19.2 53.975,47.2 VT6.2 ; R18.2 57.725,47.2 VT5.2
  Top Layer w0.4: DD3.5 21.225,2.65 21.55,2.325 21.875,2.65 DD3.6 ; DD2.5 36.9,31.525 37.075,31.7 C8.1@37.125,31.7 ; DD2.6 36.9,32.175 C8.1@37.15,31.925
  Top Layer w0.5: L1.1 25.175,48.5 27.375,46.3 27.375,40.125 v1(29.35,38.15) ; v1(35.3,38.125) R58.2 41.9,38.125 ; v1(37.75,30.35) C8.1 ; v1(42.7,30.35) 43.075,30.725 43.075,36.95 41.9,38.125 ; XP1.2@80.35,44.675 79.1,43.425 62.425,43.425 59.7,46.15 58.775,46.15 VT5.2 56.975,46.15 55.025,46.15 VT6.2 52.35,45.275 45.825,45.275 43.075,42.525 43.075,39.3 41.9,38.125
  Top Layer w0.6: C7.1 21.525,1.425 27.575,1.425 29.75,3.6 82.869,3.6 90.93,11.661 90.93,13.305 ; L3.1 67,21.65 v1(67.825,22.475) ; XP1.2 82.475,43.175 88.2,43.175 89,42.375 DD6.16 91.275,42.375 C23.1 91.275,34.85 ; DD8.10 90.93,13.305 ; DD8.16 C22.1@91.275,20.925 ; DD7.10 91.23,23.98 91.275,24.025 ; DD7.16 C21.1@91.275,31.6 ; DD6.10 91.18,34.755 91.275,34.85 ; v1(91.275,20.53) C22.1@91.275,20.925 ; v1(92.862,15.238) 90.93,13.305 ; C22.1@91.275,20.925 91.275,24.025 ; 91.275,24.025 C21.1 C21.1@91.275,31.6 ; C21.1@91.275,31.6 91.275,34.85
  Bottom Layer w0.5: v1(29.35,38.15) 35.275,38.15 v1(35.3,38.125) ; v1(37.75,30.35) v1(42.7,30.35)
  Bottom Layer w0.6: v1(67.825,22.475) 70.74,25.39 70.74,27.625 75.68,32.565 75.68,42.022 77.383,43.725 78.972,43.725 80.475,45.228 XP1.2 ; v1(91.275,20.53) 92.862,18.942 v1(92.862,15.238)
pads on no net: DD1.5 DD3.10 DD4.2 DD4.7 DD4.8 DD4.9 DD4.10 DD4.11 DD4.12 DD4.13 DD4.14 DD5.2 DD5.5 DD5.6 DD5.7 DD5.8 DD5.9 DD5.10 DD5.11 DD5.12 DD5.13 DD5.14 DD5.15 DD5.16 DD5.17 DD5.18 DD5.19 DD5.20 DD5.21 DD5.39 DD8.7 DD8.9 XP1.8

## Polygon pours and split planes (outlines as drawn)
AUDIO_GND on Bottom Layer "AUDIO" (solid, remove dead copper, pour order 4): 5,56.5 44.5,56.5 44.5,37 49.5,37 58.5,28 58.5,19.5 37,19.5 37,14.5 42,9.5 42,0.5 5,0.5 cw(c5,5) 0.5,5 0.5,52 cw(c5,52)
BAT_GND on Bottom Layer "BAT" (solid, remove dead copper, pour order 2): 94.5,5 94.5,52 ccw(c90,52) 90,56.5 45,56.5 45,37.5 50,37.5 59,28.5 59,19 37.5,19 37.5,15 42.5,10 42.5,0.5 90,0.5 ccw(c90,5)
BAT_GND on Top Layer "BAT" (solid, remove dead copper, pour order 8): 90,56.5 45,56.5 45,45.5 39,39.5 34,39.5 34,29.5 33,28.5 31.5,28.5 27,24 27,6.35 22.993,6.35 21.643,5 18,5 18,0.5 90,0.5 ccw(c90,5) 94.5,5 94.5,52 ccw(c90,52)
AUDIO_GND on Top Layer "AUDIO" (solid, remove dead copper, pour order 10): 17.5,0.5 5,0.5 cw(c5,5) 0.5,5 0.5,52 cw(c5,52) 5,56.5 44.5,56.5 44.5,46 38.5,40 37.5,40 33.5,40 33.5,30 32.5,29 31,29 26.5,24.5 26.5,6.9 23.4,6.9 22,5.5 17.5,5.5

## Silkscreen, mask and mechanical layers (free items; w line width, h text height)
Top Overlay:
  lines w0.15: 61.25,51.7 61.25,56.7 85.675,56.7 85.675,51.7 ; 0,5 ccw(c5,5) 5,0 90,0 ccw(c90,5) 95,5 95,52 ccw(c90,52) 90,57 5,57 ccw(c5,52) 0,52 0,5
Bottom Overlay:
  the board outline again, w0.15
  text "ChiptunePlayer-2.22-AudioShieldAYYM" at 82.3,12.85 h2
  text "20.07.2018" at 82.325,8.425 h2
  text "v1.0" at 82.325,4.075 h2
Keep:
  the board outline again, w0.15

## Text inside footprints (layer, text, board x,y; h text height)
C1: Top Overlay "+" at 12.65,30.15 h1 r270
C2: Top Overlay "+" at 12.85,45.675 h1
C4: Top Overlay "+" at 1.65,30.125 h1 r270
C10: Top Overlay "+" at 49.85,25.925 h1 r270
C12: Top Overlay "+" at 34.8,19.475 h1 r90